# EAGLE board IN-12_panelB (EAGLE 9.6.2), part 1 of 2
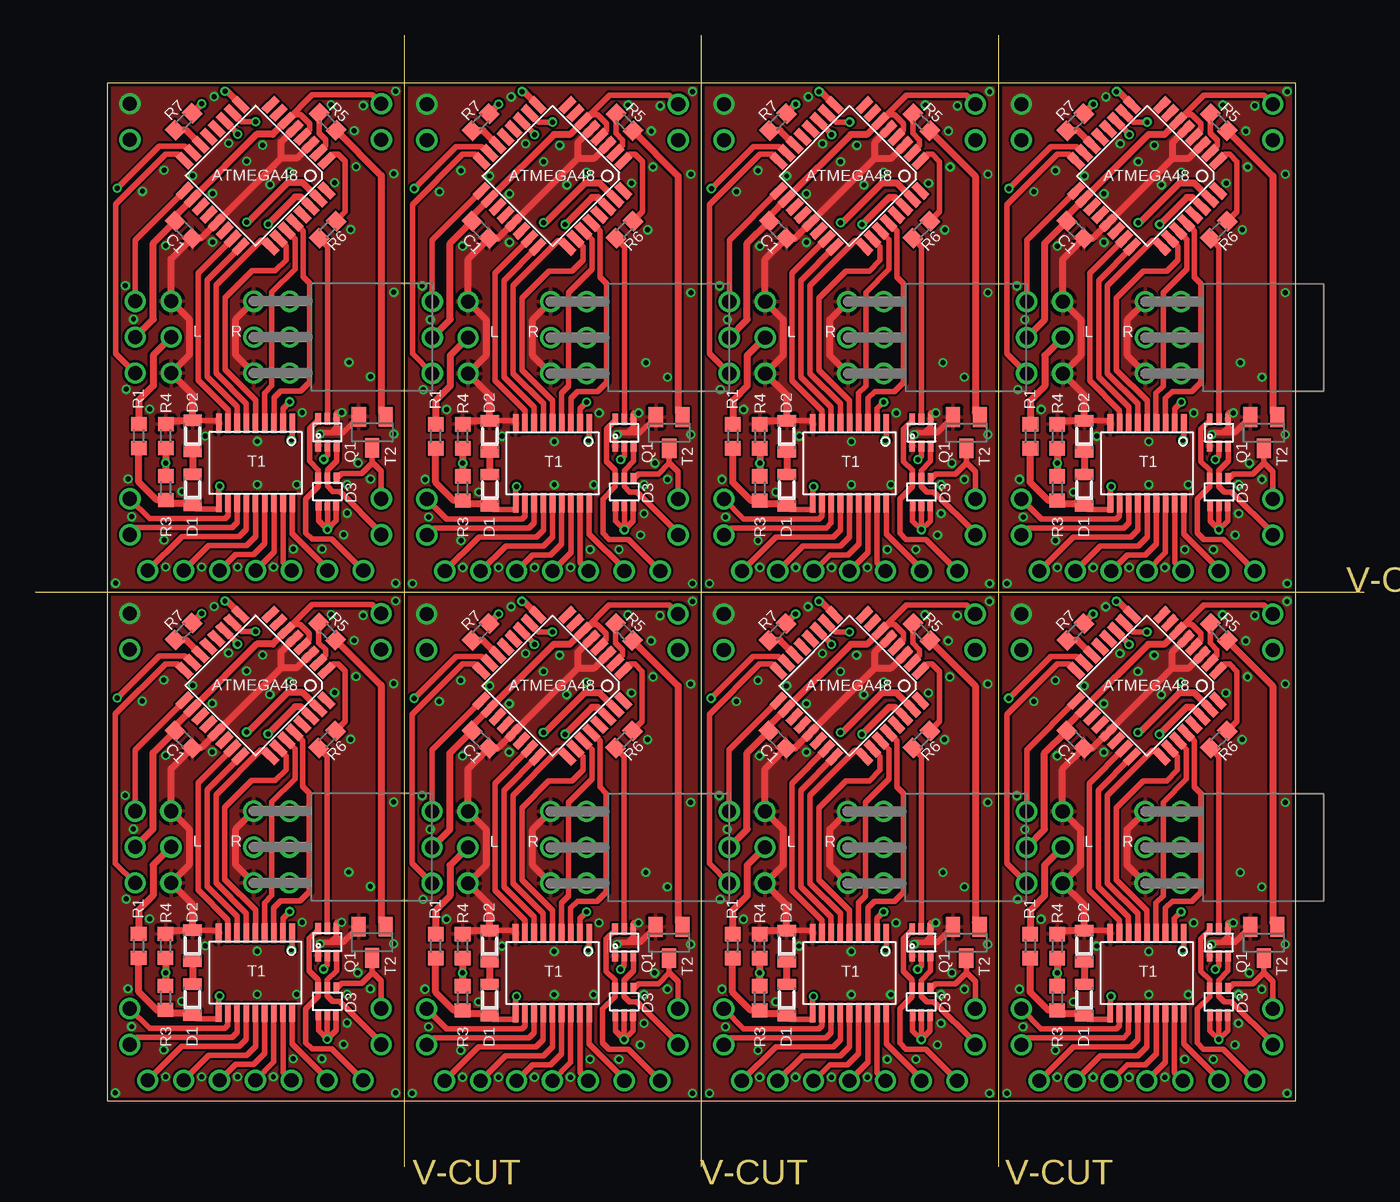
[diagram p0: board, top side]
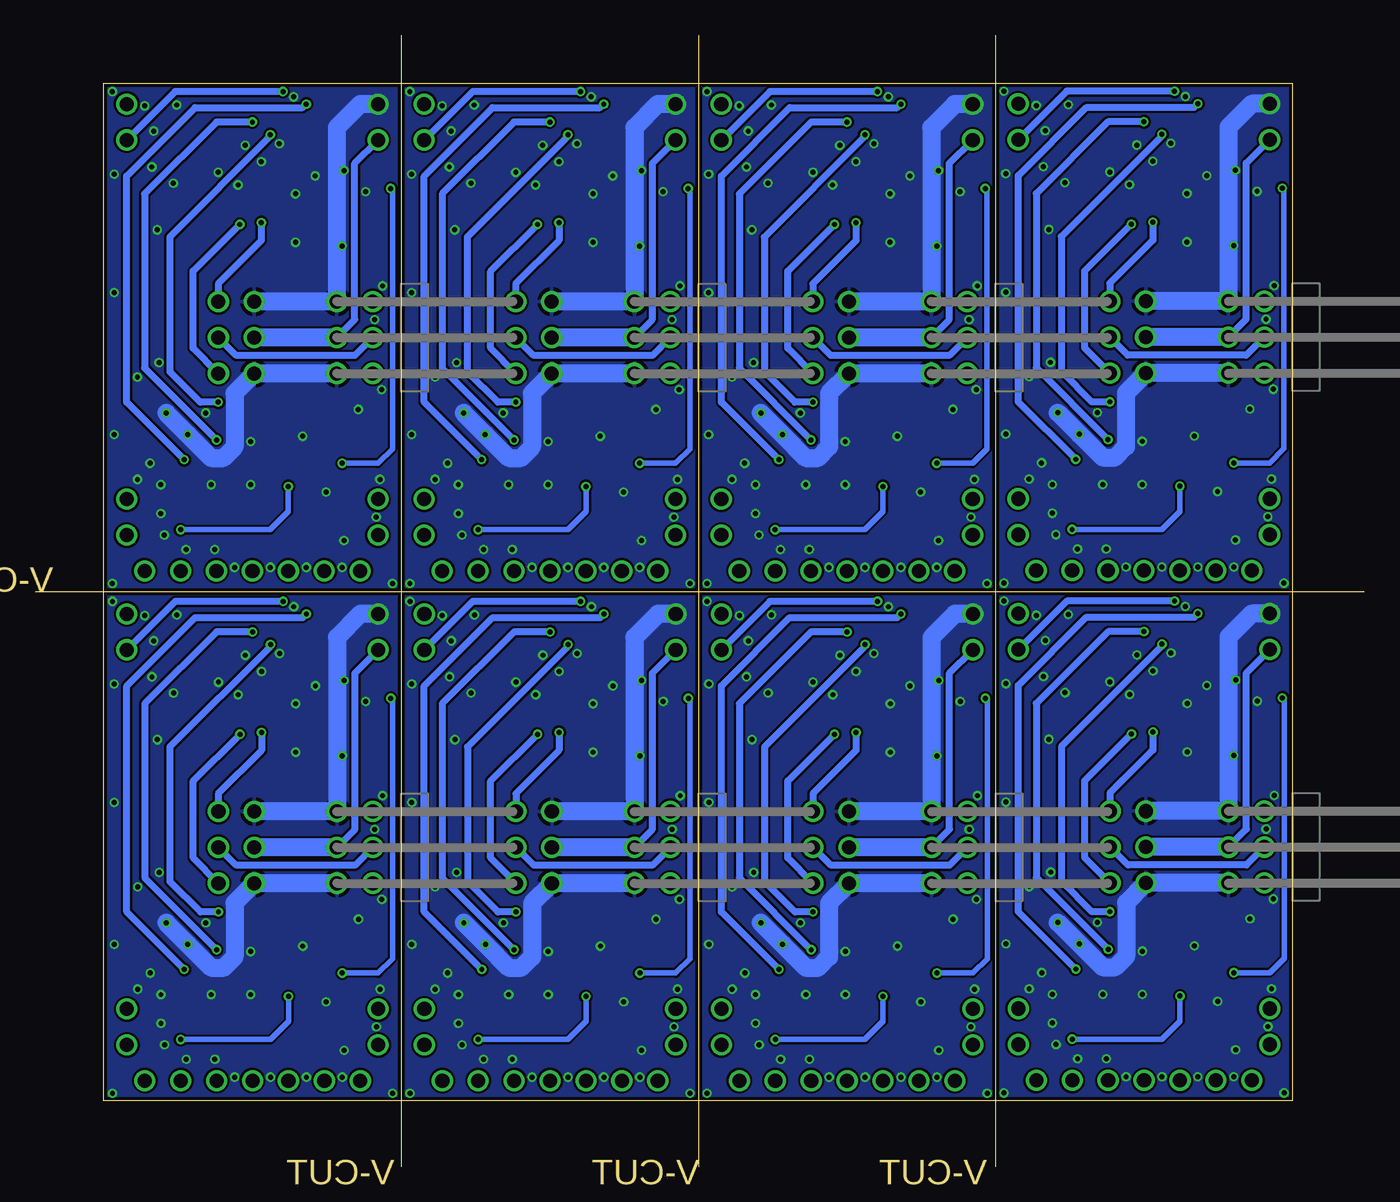
[diagram p1: board, bottom side, seen from below]

Size 93.98 x 80.01 mm. Coordinates in mm from the lower left corner, seen from the top.
Outline: 26.08,80.01 26.08,0
Outline: 47.09,80.01 47.09,0
Outline: 68.11,80.01 68.11,0
Outline: 0,40.64 93.98,40.64
Outline: 5.08,76.64 5.08,4.64 89.13,4.64 89.13,76.64 5.08,76.64
Copper layers (1*16): Top 0.035mm / dielectric 1.5mm / Bottom 0.035mm
Design rules "SeeedStudio_2layer_DRU_no_angle_20140221": minimum track width 6mil, minimum drill 12mil, track to track 6mil, track to pad 6mil, pad to pad 6mil, via to via 6mil, smd to smd 0mil, copper to edge 10mil, drill to drill 10mil, minimum pad ring 10mil, minimum via ring 6mil, stop-mask expansion 2mil, vias tented up to drill 100mil, thermal gap 10mil

## Footprints (pad centres in the part's own frame; a part is rotated, then mirrored left to right if it is on the bottom)
TQFP32-08 = smd 1.27 x 0.559: 1 -4.293,2.8; 2 -4.293,2; 3 -4.293,1.2; 4 -4.293,0.4; 5 -4.293,-0.4; 6 -4.293,-1.2; 7 -4.293,-2; 8 -4.293,-2.8; 17 4.293,-2.8; 18 4.293,-2; 19 4.293,-1.2; 20 4.293,-0.4; 21 4.293,0.4; 22 4.293,1.2; 23 4.293,2; 24 4.293,2.8 | smd 0.559 x 1.27: 9 -2.8,-4.293; 10 -2,-4.293; 11 -1.2,-4.293; 12 -0.4,-4.293; 13 0.4,-4.293; 14 1.2,-4.293; 15 2,-4.293; 16 2.8,-4.293; 25 2.8,4.293; 26 2,4.293; 27 1.2,4.293; 28 0.4,4.293; 29 -0.4,4.293; 30 -1.2,4.293; 31 -2,4.293; 32 -2.8,4.293
C0603 = smd 1.1 x 1: 1 -0.85,0; 2 0.85,0
S-MINI-2P = smd 0.8 x 1.3: 1 -1.1,0; 2 1.1,0
SMINI6-F1 = smd 0.4 x 0.8: P1 -0.65,-0.95; P2 0,-0.95; P3 0.65,-0.95; P4 0.62,0.95; P5 0,0.95; P6 -0.62,0.95
P2_3_2.54S = drill 1: 1 0,2.54; 2 0,0; 3 0,-2.54; 4 -2.54,2.54; 5 -2.54,0; 6 -2.54,-2.54
SOT-363 = smd 0.4 x 0.8: 1 -0.65,-0.95; 2 0,-0.95; 3 0.65,-0.95; 4 0.65,0.95; 5 0,0.95; 6 -0.65,0.95
P2_3_2.54SF = drill 1: 1 2.54,2.54; 2 2.54,0; 3 2.54,-2.54; 4 0,2.54; 5 0,0; 6 0,-2.54
R0603 = smd 1 x 1.1: 1 -0.85,0; 2 0.85,0
SSOP18-P-225-0.65 = smd 1.35 x 0.4: P1 -2.8,2.6; P2 -2.8,1.95; P3 -2.8,1.3; P4 -2.8,0.65; P5 -2.8,0; P6 -2.8,-0.65; P7 -2.8,-1.3; P8 -2.8,-1.95; P9 -2.8,-2.6; P10 2.8,-2.6; P11 2.8,-1.95; P12 2.8,-1.3; P13 2.8,-0.65; P14 2.8,0; P15 2.8,0.65; P16 2.8,1.3; P17 2.8,1.95; P18 2.8,2.6
SOT23 = smd 1 x 1.4: 1 -0.95,-1.1; 2 0.95,-1.1; 3 0,1.1

## Placement (x,y rotation side)
ATMEGA1  ATMEGA48/88/168-AU  [TQFP32-08]  15.57,34.03 225 top
ATMEGA2  ATMEGA48/88/168-AU  [TQFP32-08]  36.58,70.07 225 top
ATMEGA3  ATMEGA48/88/168-AU  [TQFP32-08]  36.57,34.01 225 top
ATMEGA4  ATMEGA48/88/168-AU  [TQFP32-08]  57.59,70.07 225 top
ATMEGA5  ATMEGA48/88/168-AU  [TQFP32-08]  57.58,34.01 225 top
ATMEGA6  ATMEGA48/88/168-AU  [TQFP32-08]  78.63,70.07 225 top
ATMEGA7  ATMEGA48/88/168-AU  [TQFP32-08]  78.62,34.01 225 top
ATMEGA48  ATMEGA48/88/168-AU  [TQFP32-08]  15.57,70.09 225 top
C1  0.1µF  [C0603]  10.5,66.28 315 top
C2  0.1µF  [C0603]  10.49,30.22 315 top
C3  0.1µF  [C0603]  31.5,66.26 315 top
C4  0.1µF  [C0603]  31.49,30.2 315 top
C5  0.1µF  [C0603]  52.51,66.26 315 top
C6  0.1µF  [C0603]  52.5,30.2 315 top
C7  0.1µF  [C0603]  73.55,66.26 315 top
C8  0.1µF  [C0603]  73.54,30.2 315 top
D1  36V  [S-MINI-2P]  11.13,47.87 270 top
D2  12V  [S-MINI-2P]  11.13,51.68 270 top
D3  MA6Z121  [SMINI6-F1]  20.66,47.74 180 top
D4  36V  [S-MINI-2P]  11.12,11.81 270 top
D5  12V  [S-MINI-2P]  11.12,15.62 270 top
D6  MA6Z121  [SMINI6-F1]  20.65,11.68 180 top
D7  36V  [S-MINI-2P]  32.13,47.84 270 top
D8  12V  [S-MINI-2P]  32.13,51.65 270 top
D9  MA6Z121  [SMINI6-F1]  41.66,47.71 180 top
D10  36V  [S-MINI-2P]  32.12,11.78 270 top
D11  12V  [S-MINI-2P]  32.12,15.59 270 top
D12  MA6Z121  [SMINI6-F1]  41.65,11.66 180 top
D13  36V  [S-MINI-2P]  53.14,47.84 270 top
D14  12V  [S-MINI-2P]  53.14,51.65 270 top
D15  MA6Z121  [SMINI6-F1]  62.67,47.71 180 top
D16  36V  [S-MINI-2P]  53.13,11.78 270 top
D17  12V  [S-MINI-2P]  53.13,15.59 270 top
D18  MA6Z121  [SMINI6-F1]  62.66,11.66 180 top
D19  36V  [S-MINI-2P]  74.18,47.84 270 top
D20  12V  [S-MINI-2P]  74.18,51.65 270 top
D21  MA6Z121  [SMINI6-F1]  83.71,47.71 180 top
D22  36V  [S-MINI-2P]  74.17,11.78 270 top
D23  12V  [S-MINI-2P]  74.17,15.59 270 top
D24  MA6Z121  [SMINI6-F1]  83.7,11.66 180 top
L  P2_3_2.54S  [P2_3_2.54S]  7.07,58.66 0 bottom
L1  P2_3_2.54S  [P2_3_2.54S]  7.06,22.6 0 bottom
L2  P2_3_2.54S  [P2_3_2.54S]  28.07,58.64 0 bottom
L3  P2_3_2.54S  [P2_3_2.54S]  28.06,22.58 0 bottom
L4  P2_3_2.54S  [P2_3_2.54S]  49.08,58.64 0 bottom
L5  P2_3_2.54S  [P2_3_2.54S]  49.07,22.58 0 bottom
L6  P2_3_2.54S  [P2_3_2.54S]  70.12,58.64 0 bottom
L7  P2_3_2.54S  [P2_3_2.54S]  70.11,22.58 0 bottom
Q1  HN1C01FU  [SOT-363]  20.66,51.93 0 top
Q2  HN1C01FU  [SOT-363]  20.65,15.87 0 top
Q3  HN1C01FU  [SOT-363]  41.66,51.91 0 top
Q4  HN1C01FU  [SOT-363]  41.65,15.85 0 top
Q5  HN1C01FU  [SOT-363]  62.67,51.91 0 top
Q6  HN1C01FU  [SOT-363]  62.66,15.85 0 top
Q7  HN1C01FU  [SOT-363]  83.71,51.91 0 top
Q8  HN1C01FU  [SOT-363]  83.7,15.85 0 top
R  P2_3_2.54SF  [P2_3_2.54SF]  15.45,58.66 0 top
R1  1M  [R0603]  7.32,51.68 90 top
R2  P2_3_2.54SF  [P2_3_2.54SF]  15.44,22.6 0 top
R3  1M  [R0603]  9.22,47.99 270 top
R4  100k  [R0603]  9.22,51.68 270 top
R5  10k  [R0603]  20.66,73.9 315 top
R6  10k  [R0603]  20.66,66.28 225 top
R7  10k  [R0603]  10.5,73.9 45 top
R8  1M  [R0603]  7.31,15.62 90 top
R9  1M  [R0603]  9.22,11.93 270 top
R10  100k  [R0603]  9.22,15.62 270 top
R11  10k  [R0603]  20.65,37.84 315 top
R12  10k  [R0603]  20.65,30.22 225 top
R13  10k  [R0603]  10.49,37.84 45 top
R14  P2_3_2.54SF  [P2_3_2.54SF]  36.45,58.64 0 top
R15  1M  [R0603]  28.32,51.65 90 top
R16  1M  [R0603]  30.23,47.97 270 top
R17  100k  [R0603]  30.23,51.65 270 top
R18  10k  [R0603]  41.66,73.88 315 top
R19  10k  [R0603]  41.66,66.26 225 top
R20  10k  [R0603]  31.5,73.88 45 top
R21  P2_3_2.54SF  [P2_3_2.54SF]  36.44,22.58 0 top
R22  1M  [R0603]  28.31,15.59 90 top
R23  1M  [R0603]  30.22,11.91 270 top
R24  100k  [R0603]  30.22,15.59 270 top
R25  10k  [R0603]  41.65,37.82 315 top
R26  10k  [R0603]  41.65,30.2 225 top
R27  10k  [R0603]  31.49,37.82 45 top
R28  P2_3_2.54SF  [P2_3_2.54SF]  57.46,58.64 0 top
R29  1M  [R0603]  49.33,51.65 90 top
R30  1M  [R0603]  51.24,47.97 270 top
R31  100k  [R0603]  51.24,51.65 270 top
R32  10k  [R0603]  62.67,73.88 315 top
R33  10k  [R0603]  62.67,66.26 225 top
R34  10k  [R0603]  52.51,73.88 45 top
R35  P2_3_2.54SF  [P2_3_2.54SF]  57.45,22.58 0 top
R36  1M  [R0603]  49.32,15.59 90 top
R37  1M  [R0603]  51.23,11.91 270 top
R38  100k  [R0603]  51.23,15.59 270 top
R39  10k  [R0603]  62.66,37.82 315 top
R40  10k  [R0603]  62.66,30.2 225 top
R41  10k  [R0603]  52.5,37.82 45 top
R42  P2_3_2.54SF  [P2_3_2.54SF]  78.5,58.64 0 top
R43  1M  [R0603]  70.37,51.65 90 top
R44  1M  [R0603]  72.28,47.97 270 top
R45  100k  [R0603]  72.28,51.65 270 top
R46  10k  [R0603]  83.71,73.88 315 top
R47  10k  [R0603]  83.71,66.26 225 top
R48  10k  [R0603]  73.55,73.88 45 top
R49  P2_3_2.54SF  [P2_3_2.54SF]  78.49,22.58 0 top
R50  1M  [R0603]  70.36,15.59 90 top
R51  1M  [R0603]  72.27,11.91 270 top
R52  100k  [R0603]  72.27,15.59 270 top
R53  10k  [R0603]  83.7,37.82 315 top
R54  10k  [R0603]  83.7,30.2 225 top
R55  10k  [R0603]  73.54,37.82 45 top
T1  TD62083AFNG  [SSOP18-P-225-0.65]  15.57,49.77 270 top
T2  BC846  [SOT23]  23.83,51.93 180 top
T3  TD62083AFNG  [SSOP18-P-225-0.65]  15.57,13.71 270 top
T4  BC846  [SOT23]  23.82,15.87 180 top
T5  TD62083AFNG  [SSOP18-P-225-0.65]  36.58,49.75 270 top
T6  BC846  [SOT23]  44.83,51.91 180 top
T7  TD62083AFNG  [SSOP18-P-225-0.65]  36.57,13.69 270 top
T8  BC846  [SOT23]  44.82,15.85 180 top
T9  TD62083AFNG  [SSOP18-P-225-0.65]  57.59,49.75 270 top
T10  BC846  [SOT23]  65.84,51.91 180 top
T11  TD62083AFNG  [SSOP18-P-225-0.65]  57.58,13.69 270 top
T12  BC846  [SOT23]  65.83,15.85 180 top
T13  TD62083AFNG  [SSOP18-P-225-0.65]  78.63,49.75 270 top
T14  BC846  [SOT23]  86.88,51.91 180 top
T15  TD62083AFNG  [SSOP18-P-225-0.65]  78.62,13.69 270 top
T16  BC846  [SOT23]  86.88,15.85 180 top

## Library data of the parts
ATMEGA1-ATMEGA7 ATMEGA48 = atmega8
C1-C8 = rcl; SPICEPREFIX: C
D1 D2 D4 D5 D7 D8 D10 D11 D13 D14 D16 D17 D19 D20 D22 D23 = m-pad-2.1
D3 D6 D9 D12 D15 D18 D21 D24 = diodes
L L1-L7 R R2 R14 R21 R28 R35 R42 R49 = pins
Q1-Q8 T1 T3 T5 T7 T9 T11 T13 T15 = transistors
R1 R3-R13 R15-R20 R22-R27 R29-R34 R36-R41 R43-R48 R50-R55 = rcl; SPICEPREFIX: R
T2 T4 T6 T8 T10 T12 T14 T16 = transistor

## Nets
GND: ATMEGA48.3 ATMEGA48.5 ATMEGA48.21 C1.2 D2.1 L.4 L.6 Q1.1 Q1.4 R4.1 R.4 R.6 T1.P9 T2.2
GND1: ATMEGA1.3 ATMEGA1.5 ATMEGA1.21 C2.2 D5.1 L1.4 L1.6 Q2.1 Q2.4 R2.4 R2.6 R10.1 T3.P9 T4.2
GND2: ATMEGA2.3 ATMEGA2.5 ATMEGA2.21 C3.2 D8.1 L2.4 L2.6 Q3.1 Q3.4 R14.4 R14.6 R17.1 T5.P9 T6.2
GND3: ATMEGA3.3 ATMEGA3.5 ATMEGA3.21 C4.2 D11.1 L3.4 L3.6 Q4.1 Q4.4 R21.4 R21.6 R24.1 T7.P9 T8.2
GND4: ATMEGA4.3 ATMEGA4.5 ATMEGA4.21 C5.2 D14.1 L4.4 L4.6 Q5.1 Q5.4 R28.4 R28.6 R31.1 T9.P9 T10.2
GND5: ATMEGA5.3 ATMEGA5.5 ATMEGA5.21 C6.2 D17.1 L5.4 L5.6 Q6.1 Q6.4 R35.4 R35.6 R38.1 T11.P9 T12.2
GND6: ATMEGA6.3 ATMEGA6.5 ATMEGA6.21 C7.2 D20.1 L6.4 L6.6 Q7.1 Q7.4 R42.4 R42.6 R45.1 T13.P9 T14.2
GND7: ATMEGA7.3 ATMEGA7.5 ATMEGA7.21 C8.2 D23.1 L7.4 L7.6 Q8.1 Q8.4 R49.4 R49.6 R52.1 T15.P9 T16.2
K0: T1.P18
K1: T1.P15
K2: T1.P14
K3: D3.P3 Q1.6
K4: T1.P13
K5: T1.P12
K6: T1.P11
K7: T1.P16
K8: D3.P2 Q1.3
K9: T1.P17
K10: T3.P18
K11: T3.P17
K12: D6.P2 Q2.3
K13: T3.P16
K14: T3.P11
K15: T3.P12
K16: T3.P13
K17: D6.P3 Q2.6
K18: T3.P14
K19: T3.P15
K20: T5.P18
K21: T5.P17
K22: D9.P2 Q3.3
K23: T5.P16
K24: T5.P11
K25: T5.P12
K26: T5.P13
K27: D9.P3 Q3.6
K28: T5.P14
K29: T5.P15
K30: T7.P18
K31: T7.P17
K32: D12.P2 Q4.3
K33: T7.P16
K34: T7.P11
K35: T7.P12
K36: T7.P13
K37: D12.P3 Q4.6
K38: T7.P14
K39: T7.P15
K40: T9.P18
K41: T9.P17
K42: D15.P2 Q5.3
K43: T9.P16
K44: T9.P11
K45: T9.P12
K46: T9.P13
K47: D15.P3 Q5.6
K48: T9.P14
K49: T9.P15
K50: T11.P18
K51: T11.P17
K52: D18.P2 Q6.3
K53: T11.P16
K54: T11.P11
K55: T11.P12
K56: T11.P13
K57: D18.P3 Q6.6
K58: T11.P14
K59: T11.P15
K60: T13.P18
K61: T13.P17
K62: D21.P2 Q7.3
K63: T13.P16
K64: T13.P11
K65: T13.P12
K66: T13.P13
K67: D21.P3 Q7.6
K68: T13.P14
K69: T13.P15
K70: T15.P18
K71: T15.P17
K72: D24.P2 Q8.3
K73: T15.P16
K74: T15.P11
K75: T15.P12
K76: T15.P13
K77: D24.P3 Q8.6
K78: T15.P14
K79: T15.P15
KD: D3.P1 T2.3
KD1: D6.P1 T4.3
KD2: D9.P1 T6.3
KD3: D12.P1 T8.3
KD4: D15.P1 T10.3
KD5: D18.P1 T12.3
KD6: D21.P1 T14.3
KD7: D24.P1 T16.3
L_RX: ATMEGA48.17 L.1
L_RX1: ATMEGA1.17 L1.1
L_RX2: ATMEGA2.17 L2.1
L_RX3: ATMEGA3.17 L3.1
L_RX4: ATMEGA4.17 L4.1
L_RX5: ATMEGA5.17 L5.1
L_RX6: ATMEGA6.17 L6.1
L_RX7: ATMEGA7.17 L7.1
L_TX: ATMEGA48.16 L.3
L_TX1: ATMEGA1.16 L1.3
L_TX2: ATMEGA2.16 L2.3
L_TX3: ATMEGA3.16 L3.3
L_TX4: ATMEGA4.16 L4.3
L_TX5: ATMEGA5.16 L5.3
L_TX6: ATMEGA6.16 L6.3
L_TX7: ATMEGA7.16 L7.3
LED: ATMEGA48.9
LED1: ATMEGA1.9
LED2: ATMEGA2.9
LED3: ATMEGA3.9
LED4: ATMEGA4.9
LED5: ATMEGA5.9
LED6: ATMEGA6.9
LED7: ATMEGA7.9
N0: ATMEGA48.10 T1.P1
N1: ATMEGA48.27 T1.P4
N2: ATMEGA48.26 T1.P5
N3: ATMEGA48.14 R7.1
N4: ATMEGA48.25 T1.P6
N5: ATMEGA48.24 T1.P7
N6: ATMEGA48.23 T1.P8
N7: ATMEGA48.28 T1.P3
N8: ATMEGA48.1 R6.1
N9: ATMEGA48.11 T1.P2
N10: ATMEGA1.23 T3.P8
N11: ATMEGA1.24 T3.P7
N12: ATMEGA1.26 T3.P5
N13: ATMEGA1.27 T3.P4
N14: ATMEGA1.28 T3.P3
N15: ATMEGA1.11 T3.P2
N16: ATMEGA1.10 T3.P1
N17: ATMEGA1.25 T3.P6
N18: ATMEGA1.1 R12.1
N19: ATMEGA1.14 R13.1
N20: ATMEGA2.23 T5.P8
N21: ATMEGA2.24 T5.P7
N22: ATMEGA2.26 T5.P5
N23: ATMEGA2.27 T5.P4
N24: ATMEGA2.28 T5.P3
N25: ATMEGA2.11 T5.P2
N26: ATMEGA2.10 T5.P1
N27: ATMEGA2.25 T5.P6
N28: ATMEGA2.1 R19.1
N29: ATMEGA2.14 R20.1
N30: ATMEGA3.23 T7.P8
N31: ATMEGA3.24 T7.P7
N32: ATMEGA3.26 T7.P5
N33: ATMEGA3.27 T7.P4
N34: ATMEGA3.28 T7.P3
N35: ATMEGA3.11 T7.P2
N36: ATMEGA3.10 T7.P1
N37: ATMEGA3.25 T7.P6
N38: ATMEGA3.1 R26.1
N39: ATMEGA3.14 R27.1
N40: ATMEGA4.23 T9.P8
N41: ATMEGA4.24 T9.P7
N42: ATMEGA4.26 T9.P5
N43: ATMEGA4.27 T9.P4
N44: ATMEGA4.28 T9.P3
N45: ATMEGA4.11 T9.P2
N46: ATMEGA4.10 T9.P1
N47: ATMEGA4.25 T9.P6
N48: ATMEGA4.1 R33.1
N49: ATMEGA4.14 R34.1
N50: ATMEGA5.23 T11.P8
N51: ATMEGA5.24 T11.P7
N52: ATMEGA5.26 T11.P5
N53: ATMEGA5.27 T11.P4
N54: ATMEGA5.28 T11.P3
N55: ATMEGA5.11 T11.P2
N56: ATMEGA5.10 T11.P1
N57: ATMEGA5.25 T11.P6
N58: ATMEGA5.1 R40.1
N59: ATMEGA5.14 R41.1
N60: ATMEGA6.23 T13.P8
N61: ATMEGA6.24 T13.P7
N62: ATMEGA6.26 T13.P5
N63: ATMEGA6.27 T13.P4
N64: ATMEGA6.28 T13.P3
N65: ATMEGA6.11 T13.P2
N66: ATMEGA6.10 T13.P1
N67: ATMEGA6.25 T13.P6
N68: ATMEGA6.1 R47.1
N69: ATMEGA6.14 R48.1
N70: ATMEGA7.23 T15.P8
N71: ATMEGA7.24 T15.P7
N72: ATMEGA7.26 T15.P5
N73: ATMEGA7.27 T15.P4
N74: ATMEGA7.28 T15.P3
N75: ATMEGA7.11 T15.P2
N76: ATMEGA7.10 T15.P1
N77: ATMEGA7.25 T15.P6
N78: ATMEGA7.1 R54.1
N79: ATMEGA7.14 R55.1
N$1: D1.1 D2.2
N$2: D1.2 D3.P4 D3.P5 D3.P6 R1.1 R3.2 T1.P10
N$3: D4.1 D5.2
N$4: D4.2 D6.P4 D6.P5 D6.P6 R8.1 R9.2 T3.P10
N$5: Q2.2 R13.2
N$6: Q2.5 R12.2
N$7: R11.2 T4.1
N$8: D7.1 D8.2
N$9: D7.2 D9.P4 D9.P5 D9.P6 R15.1 R16.2 T5.P10
N$10: Q3.2 R20.2
N$11: Q3.5 R19.2
N$12: Q1.2 R7.2
N$13: R18.2 T6.1
N$14: Q1.5 R6.2
N$15: R5.2 T2.1
N$16: D10.1 D11.2
N$17: D10.2 D12.P4 D12.P5 D12.P6 R22.1 R23.2 T7.P10
N$18: Q4.2 R27.2
N$19: Q4.5 R26.2
N$20: R25.2 T8.1
N$21: D13.1 D14.2
N$22: D13.2 D15.P4 D15.P5 D15.P6 R29.1 R30.2 T9.P10
N$23: Q5.2 R34.2
N$24: Q5.5 R33.2
N$25: R32.2 T10.1
N$26: D16.1 D17.2
N$27: D16.2 D18.P4 D18.P5 D18.P6 R36.1 R37.2 T11.P10
N$28: Q6.2 R41.2
N$29: Q6.5 R40.2
N$30: R39.2 T12.1
N$31: D19.1 D20.2
N$32: D19.2 D21.P4 D21.P5 D21.P6 R43.1 R44.2 T13.P10
N$33: Q7.2 R48.2
N$34: Q7.5 R47.2
N$35: R46.2 T14.1
N$36: D22.1 D23.2
N$37: D22.2 D24.P4 D24.P5 D24.P6 R50.1 R51.2 T15.P10
N$38: Q8.2 R55.2
N$39: Q8.5 R54.2
N$40: R53.2 T16.1
ND: ATMEGA48.2 R5.1
ND1: ATMEGA1.2 R11.1
ND2: ATMEGA2.2 R18.1
ND3: ATMEGA3.2 R25.1
ND4: ATMEGA4.2 R32.1
ND5: ATMEGA5.2 R39.1
ND6: ATMEGA6.2 R46.1
ND7: ATMEGA7.2 R53.1
R_RX: ATMEGA48.30 R.3
R_RX1: ATMEGA1.30 R2.3
R_RX2: ATMEGA2.30 R14.3
R_RX3: ATMEGA3.30 R21.3
R_RX4: ATMEGA4.30 R28.3
R_RX5: ATMEGA5.30 R35.3
R_RX6: ATMEGA6.30 R42.3
R_RX7: ATMEGA7.30 R49.3
R_TX: ATMEGA48.31 R.1
R_TX1: ATMEGA1.31 R2.1
R_TX2: ATMEGA2.31 R14.1
R_TX3: ATMEGA3.31 R21.1
R_TX4: ATMEGA4.31 R28.1
R_TX5: ATMEGA5.31 R35.1
R_TX6: ATMEGA6.31 R42.1
R_TX7: ATMEGA7.31 R49.1
SV: ATMEGA48.15 R3.1 R4.2
SV1: ATMEGA1.15 R9.1 R10.2
SV2: ATMEGA2.15 R16.1 R17.2
SV3: ATMEGA3.15 R23.1 R24.2
SV4: ATMEGA4.15 R30.1 R31.2
SV5: ATMEGA5.15 R37.1 R38.2
SV6: ATMEGA6.15 R44.1 R45.2
SV7: ATMEGA7.15 R51.1 R52.2
VCC: ATMEGA48.4 ATMEGA48.6 ATMEGA48.18 C1.1 L.2 R.2
VCC1: ATMEGA1.4 ATMEGA1.6 ATMEGA1.18 C2.1 L1.2 R2.2
VCC2: ATMEGA2.4 ATMEGA2.6 ATMEGA2.18 C3.1 L2.2 R14.2
VCC3: ATMEGA3.4 ATMEGA3.6 ATMEGA3.18 C4.1 L3.2 R21.2
VCC4: ATMEGA4.4 ATMEGA4.6 ATMEGA4.18 C5.1 L4.2 R28.2
VCC5: ATMEGA5.4 ATMEGA5.6 ATMEGA5.18 C6.1 L5.2 R35.2
VCC6: ATMEGA6.4 ATMEGA6.6 ATMEGA6.18 C7.1 L6.2 R42.2
VCC7: ATMEGA7.4 ATMEGA7.6 ATMEGA7.18 C8.1 L7.2 R49.2
VPP: L.5 R1.2 R.5
VPP1: L1.5 R2.5 R8.2
VPP2: L2.5 R14.5 R15.2
VPP3: L3.5 R21.5 R22.2
VPP4: L4.5 R28.5 R29.2
VPP5: L5.5 R35.5 R36.2
VPP6: L6.5 R42.5 R43.2
VPP7: L7.5 R49.5 R50.2